# Altium PCB OPG_v8_pcb.PcbDoc (part 3 of 3)
Units mm, origin at the board's own origin, x right, y up, seen from the top; angles counter-clockwise.
Board outline 65 x 95 mm, 2 copper layers (Top Layer, Bottom Layer), stack 0.081 mm thick; 16 components, 17 nets, 129 pads, 66 vias.
Unrouted connection lines stored in the file: 30.
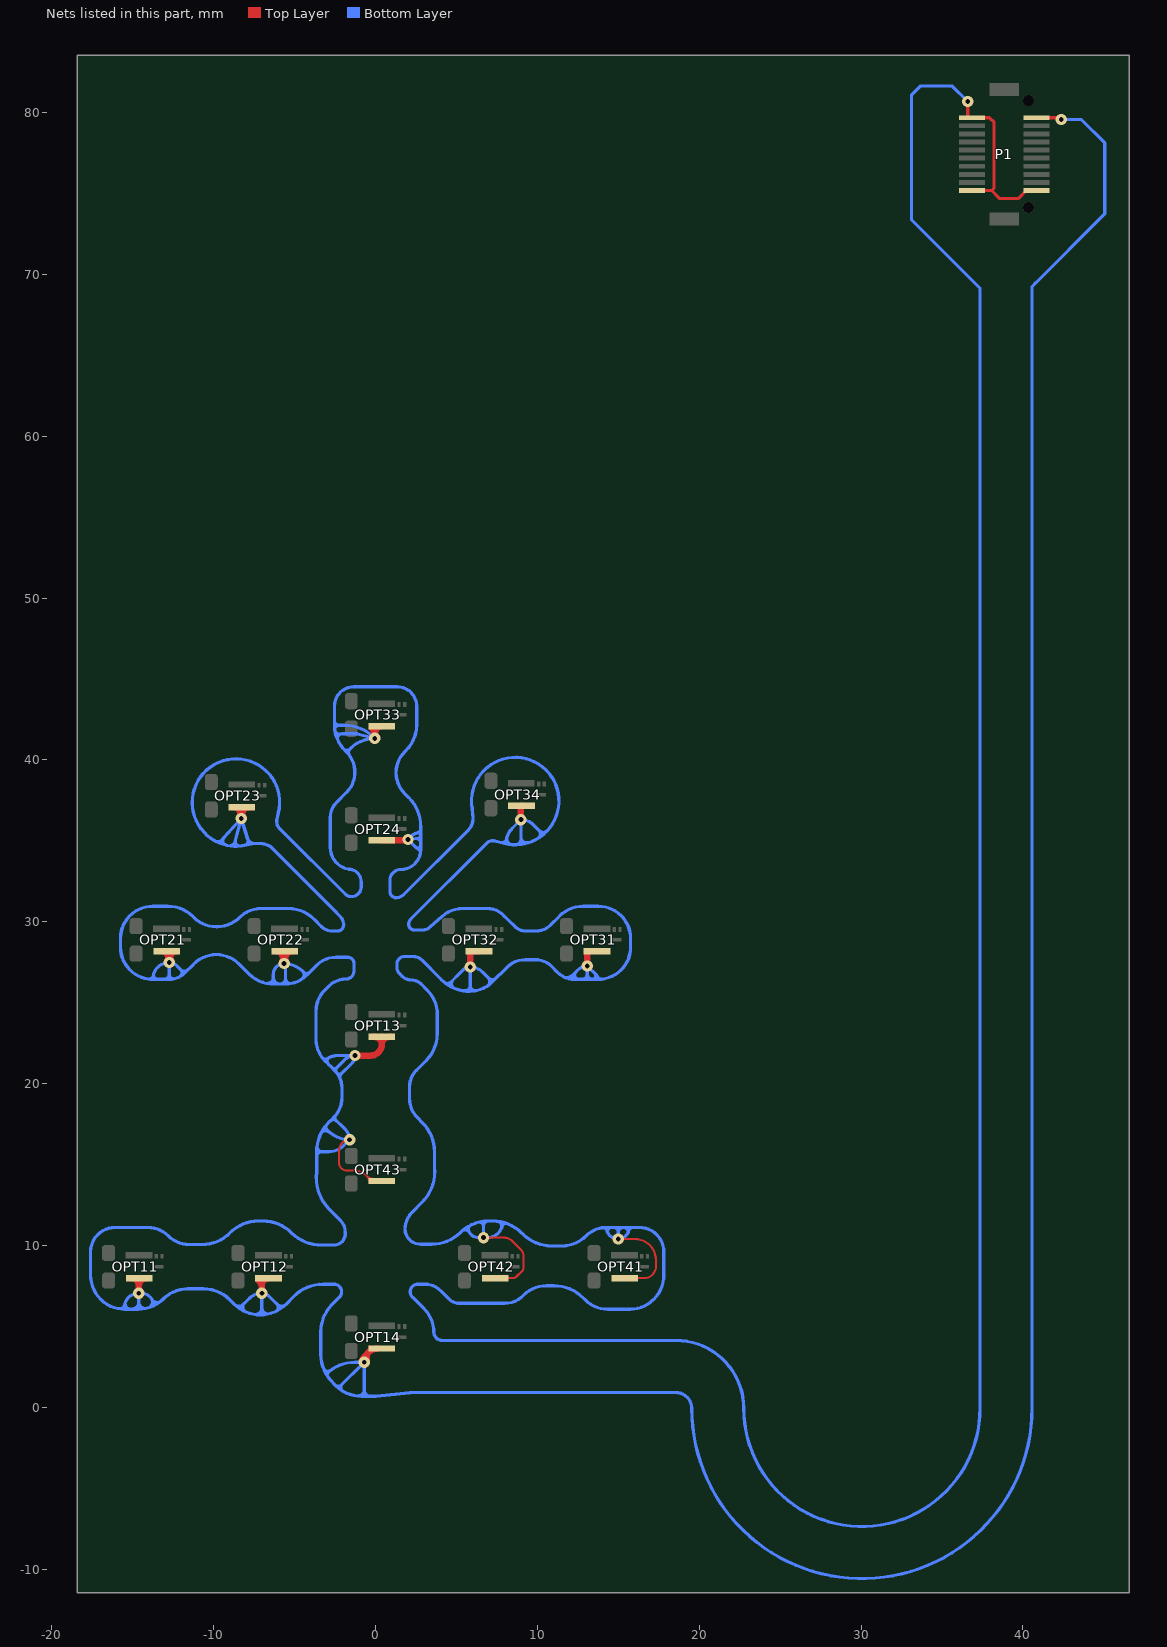
[diagram p3: the nets of this part, all layers, seen from the top]

## Via types
v1: diameter 0.7, hole 0.3, Top Layer to Bottom Layer, 49 vias
v2: diameter 0.7/0.5 (per signal layer), hole 0.3, Top Layer to Bottom Layer, 17 vias

## Nets (pads, with @x,y where several pads share a name; then routed paths per layer and width w, separated by ;. In a path a pad name is that pad's centre, name@x,y a point inside that pad or via, vN(x,y) a via of type N, cw(c..) or ccw(c..) an arc to the next point about the centre after c; other vN are vias at no path point) (continued)
Vbias: OPT11.A OPT12.A OPT13.A OPT14.A OPT21.A OPT22.A OPT23.A OPT24.A OPT31.A OPT32.A OPT33.A OPT34.A OPT41.A OPT42.A OPT43.A P1.1 P1.10 P1.11 P1.20 | length 733.9
  Top Layer w0.127: v1(-1.6,16.53) ccw(c-1.6,15.88) -2.25,15.88 -2.25,15.083 ccw(c-1.797,15.083) -1.797,14.63 -1.341,14.63 cw(c-1.341,13.529) -0.563,14.308 ; v1@-0.966,2.784 cw(c-0.361,2.784) -0.789,3.211 -0.463,3.537 ccw(c-0.687,3.762) OPT14.A@-0.37,3.762 ; OPT43.A@-0.366,13.869 ccw(c-0.95,13.869) -0.537,14.282 ; OPT43.A@0.01,14.11 -0.085,14.11 cw(c-0.085,14.786) -0.563,14.308 ; OPT43.A@0.39,13.98 -0.235,13.98 -0.537,14.282 ; v1(6.67,10.484) 7.917,10.484 cw(c7.917,9.712) 8.462,10.258 ; OPT42.A@7.39,7.98 8.152,7.98 8.513,7.98 ccw(c8.513,8.219) 8.682,8.05 9.078,8.446 ccw(c8.904,8.62) 9.15,8.62 9.15,9.34 ccw(c8.595,9.34) 8.987,9.733 8.465,10.255 ; v1(15,10.391) 16.032,10.391 cw(c16.032,9.097) 16.947,10.013 ; OPT41.A@15.39,7.98 16.599,7.98 ccw(c16.599,8.706) 17.113,8.193 ccw(c16.599,8.706) 17.325,8.706 17.325,9.1 ccw(c16.033,9.1) 16.948,10.012 ; -0.563,14.308 -0.537,14.282
  Top Layer w0.2: v1@-14.819,7.213 ccw(c-15.034,7.428) -14.729,7.428 -14.729,7.548 ; -14.528,7.547 -14.528,7.426 ccw(c-14.223,7.426) v1@-14.439,7.211 ; OPT12.A@-7.335,7.807 cw(c-8.085,7.058) -7.025,7.058 v1(-7.025,7.045) ; -6.924,7.546 -6.924,7.426 ccw(c-6.619,7.426) v1@-6.835,7.211 ; v1@-0.455,2.737 -0.455,3.108 cw(c-0.143,3.108) -0.364,3.329 OPT14.A@-0.101,3.592 ; v1@1.968,35.058 1.976,35.058 v1(2.004,35.085) ; OPT31.A@13.08,28.08 13.18,28.18 OPT31.A@13.49,28.18 ; v2(36.597,80.684) 36.597,79.734 36.647,79.684 37.927,79.684 38.222,79.389 38.222,75.339 38.067,75.184 ; P1.10@36.85,75.184 38.067,75.184 ; P1.11@40.85,75.184 40.2,75.184 39.7,74.684 38.567,74.684 38.067,75.184 ; P1.20@40.85,79.684 42.118,79.684 42.232,79.57 v2(42.367,79.57)
  Top Layer w0.3: OPT21.A@-13.2,28.131 cw(c-13.204,27.781) v1@-12.907,27.597 ; v1@-12.587,27.596 cw(c-12.289,27.78) OPT21.A@-12.293,28.13 ; OPT23.A@-8.759,37.032 cw(c-8.763,36.682) v1@-8.465,36.497 ; v1@-8.129,36.495 cw(c-7.832,36.679) OPT23.A@-7.836,37.029 ; OPT22.A@-6.16,28.132 cw(c-6.165,27.732) v1@-5.825,27.522 ; v1@-5.473,27.523 cw(c-5.133,27.733) OPT22.A@-5.138,28.133 ; OPT33.A@-0.279,41.952 cw(c-0.488,41.671) v1@-0.194,41.481 ; OPT13.A@-0.13,22.841 OPT13.A@-0.021,22.841 ; v1@0.083,41.494 cw(c0.377,41.684) OPT33.A@0.383,42.033
  Top Layer w0.4: OPT11.A@-15.051,7.977 cw(c-15.051,7.556) -14.63,7.556 ; OPT11.A@-14.65,7.98 -14.63,7.98 OPT11.A@-14.63,7.96 ; v1(-14.63,7.045) -14.63,7.494 ; OPT11.A@-14.61,7.98 ccw(c-14.61,7.96) OPT11.A@-14.63,7.96 ; OPT11.A@-14.144,7.98 ccw(c-14.144,7.494) -14.63,7.494 ; v1@-7.025,7.058 -7.025,7.565 ; v1(-1.268,21.731) -0.309,21.731 ccw(c-0.309,22.43) 0.39,22.43 ; v1(-0.7,2.78) cw(c0.15,2.78) -0.101,3.592 cw(c0.15,2.78) OPT14.A@0.15,3.63 ; OPT13.A@-0.172,22.88 -0.06,22.88 cw(c-0.06,22.43) 0.39,22.43 ; OPT13.A@0.39,22.88 0.39,22.43 ; OPT24.A@0.39,35.03 1.87,35.03 ccw(c1.87,35.219) 1.968,35.058 ccw(c1.87,35.219) v1(2.004,35.085) ; OPT13.A@0.926,22.88 0.84,22.88 ccw(c0.84,22.43) 0.39,22.43 ; v1(5.851,27.206) 5.851,28.18 OPT32.A@6.39,28.18 ; v1(8.98,36.31) 8.98,37.063 cw(c9.117,37.063) OPT34.A@9.02,37.16 ; v1(13.08,27.261) 13.08,28.08 13.08,28.18 OPT31.A@13.18,28.18 ; -14.63,7.494 -14.63,7.556 ; -14.63,7.556 OPT11.A@-14.63,7.96 ; -7.025,7.565 cw(c-6.61,7.565) OPT12.A@-6.61,7.98 -7.025,7.98 -7.025,7.565
  Top Layer w0.45: v1(-12.75,27.48) OPT21.A@-12.75,28.14 ; v1(-8.3,36.38) OPT23.A@-8.3,37.04 ; v1(-5.65,27.42) OPT22.A@-5.65,28.14 ; v1(-0.05,41.33) OPT33.A@-0.05,41.94
  Bottom Layer w0.152: -9.392,35.135 ccw(c-9.175,35.004) -9.284,34.775 ; -8.952,34.716 ccw(c-8.998,35.017) -8.719,34.895 ; -8.159,34.729 ccw(c-8.146,34.983) -7.916,35.09 ; -2.514,42.428 ccw(c-2.26,42.416) -2.22,42.165 ; -2.506,41.823 cw(c-2.256,41.863) -2.243,42.116 ; -2.481,41.78 ccw(c-2.241,41.863) -2.169,41.619 ; -2.341,41.273 cw(c-2.095,41.338) -2.138,41.589 ; -1.985,40.722 ccw(c-1.774,40.863) -1.638,40.649 ; -1.615,40.328 cw(c-1.4,40.464) -1.541,40.675 ; 2.485,35.12 cw(c2.525,34.869) 2.779,34.856 ; 2.526,34.601 ccw(c2.626,34.716) 2.776,34.741 ; 2.578,35.469 cw(c2.606,35.294) 2.784,35.285 ; 2.587,35.169 ccw(c2.595,35.347) 2.771,35.375 ; 2.588,34.494 cw(c2.507,34.254) 2.723,34.12 ; 2.597,35.519 ccw(c2.516,35.76) 2.77,35.774
  Bottom Layer w0.178: -14.104,6.127 ccw(c-14.198,6.518) -13.896,6.784 ; -13.847,6.7 ccw(c-13.492,6.888) -13.202,6.609 ; -12.018,27.032 ccw(c-11.807,27.252) -11.602,27.026 ; -9.847,34.975 ccw(c-9.731,35.257) -9.498,35.06 ; -8.762,6.404 ccw(c-8.443,6.657) -8.106,6.427 ; -8.072,6.453 ccw(c-7.867,6.194) -8.006,5.895 ; -6.154,6.424 cw(c-6.327,6.172) -6.137,5.933 ; -6.127,6.413 ccw(c-5.808,6.665) -5.472,6.435 ; -4.572,26.447 ccw(c-4.731,26.71) -4.546,26.955 ; -4.49,26.904 ccw(c-4.27,27.119) -4.022,26.939 ; -3.347,16.971 cw(c-3.098,16.754) -2.907,17.023 ; -3.33,21.658 ccw(c-3.103,21.771) -3.322,21.643 ; -3.288,21.597 ccw(c-3.103,21.771) -2.94,21.577 ; -3.203,2.353 ccw(c-2.955,2.532) -2.754,2.303 ; -3.011,17.159 cw(c-2.719,17.312) -3.01,17.467 cw(c-2.719,17.312) -2.988,17.503 ; -2.902,21.208 cw(c-2.735,21.399) -2.897,21.595 cw(c-2.735,21.399) -2.849,21.626 ; -2.882,1.789 cw(c-2.653,1.99) -2.832,2.238 ; -2.801,17.677 cw(c-2.61,17.51) -2.435,17.694 ; -2.746,21.041 ccw(c-2.543,21.193) -2.364,21.014 ; -2.553,1.428 ccw(c-2.305,1.607) -2.104,1.378 ; -2.417,18.088 ccw(c-2.248,17.898) -2.416,17.707 ; -2.36,20.631 cw(c-2.193,20.822) -2.306,21.049 ; -2.36,20.632 ccw(c-2.23,20.784) -2.087,20.644 ; -2.173,20.285 cw(c-1.944,20.394) -2.135,20.561 ; -2.004,1.473 ccw(c-1.825,1.225) -1.975,0.96 ; 4.209,26.299 ccw(c4.443,26.529) 4.662,26.285 ; 4.77,26.38 ccw(c5.023,26.17) 4.855,25.888 ; 5.335,10.888 cw(c5.528,10.652) 5.798,10.795 ; 5.764,10.858 cw(c6.042,10.982) 5.919,11.261 ; 6.915,26.576 cw(c6.723,26.31) 6.923,26.049 ; 7.03,26.503 ccw(c7.23,26.763) 7.483,26.554 ; 7.487,11.488 cw(c7.487,11.183) 7.79,11.149 ; 7.737,34.905 ccw(c7.802,35.203) 8.098,35.132 ; 7.806,11.094 cw(c8.06,11.094) 8.205,11.302 ; 12.404,26.909 ccw(c12.56,26.709) 12.481,26.468 ccw(c12.56,26.709) 12.517,26.459 ; 13.457,26.437 ccw(c13.333,26.659) 13.542,26.803 ; 13.741,26.58 ccw(c14.001,26.795) 14.103,26.474
  Bottom Layer w0.2: -17.168,10.667 ccw(c-16.099,9.599) -17.61,9.599 -17.61,8.181 ccw(c-15.459,8.181) -16.981,6.661 ; -17.167,10.668 cw(c-16.099,9.599) -16.099,11.11 -14.068,11.11 cw(c-14.068,9.31) -12.795,10.583 ccw(c-11.526,11.854) -11.526,10.058 -10.719,10.058 ccw(c-10.719,12.496) -8.996,10.771 cw(c-7.238,9.051) -7.238,11.51 -6.969,11.51 cw(c-6.969,8.97) -5.173,10.766 ccw(c-3.377,12.562) -3.377,10.022 -2.57,10.022 ccw(c-2.57,10.722) -1.87,10.722 -1.87,10.789 ccw(c-2.987,10.792) -2.2,11.585 ccw(c-2.343,11.445) -2.202,11.587 -2.859,12.244 cw(c-0.936,14.175) -3.64,14.512 -3.64,15.498 ; -16.98,6.66 ccw(c-15.53,8.111) -15.927,6.099 ; -13.707,6.273 ccw(c-14.479,6.273) -13.787,6.616 ccw(c-14.479,6.273) -13.852,6.723 ccw(c-14.479,6.273) -14.479,7.045 v1(-14.63,7.045) ; -12.047,27.054 cw(c-12.255,26.845) -12.042,26.641 ; -9.835,29.69 cw(c-9.835,31.682) -11.243,30.273 -11.296,30.326 ccw(c-12.828,28.792) -12.828,30.96 -13.761,30.96 ccw(c-13.761,28.959) -15.176,30.374 ccw(c-13.763,28.963) -15.76,28.963 -15.76,28.437 ccw(c-13.763,28.437) -15.175,27.025 ccw(c-13.763,28.437) -14.082,26.466 ; -9.779,29.69 ccw(c-9.779,31.619) -8.487,30.186 ccw(c-9.779,31.619) -8.415,30.255 -8.343,30.324 cw(c-7.051,28.891) -7.051,30.82 -5.393,30.82 cw(c-5.393,28.567) -3.8,30.16 -3.345,29.705 -3.344,29.704 ccw(c-2.667,30.384) -2.667,29.425 -2.355,29.425 ccw(c-2.355,29.81) -1.97,29.81 ccw(c-2.696,29.81) -2.183,30.323 -2.621,30.762 -6.518,34.658 ccw(c-7.123,33.675) -7.123,34.83 -7.424,34.83 ccw(c-7.424,34.63) -7.456,34.827 ; -7.432,5.73 ccw(c-7.432,6.137) -7.025,6.137 ; -6.645,5.763 cw(c-6.645,6.142) -7.025,6.142 ; -3.62,16.106 ccw(c-3.302,16.106) -3.302,15.788 ; -3.011,17.159 -2.936,17.083 ccw(c-1.6,18.419) v1(-1.6,16.53) ; -2.903,17.029 -2.941,17.049 -2.943,17.05 -2.951,17.055 -3.041,17.103 -3.217,17.196 ; -2.685,1.573 cw(c-0.981,3.262) -3.049,2.046 ; -2.684,1.573 cw(c-2.827,1.433) -2.671,1.557 ccw(c-0.869,2.982) -2.281,1.17 ; -2.083,20.641 -2.144,20.568 ; -1.338,26.947 cw(c-1.824,26.947) -1.824,26.461 ccw(c-1.824,24.942) -2.898,26.016 -3.144,25.77 ccw(c-1.859,24.487) -3.675,24.487 -3.675,22.733 ccw(c-1.818,22.733) -3.322,21.643 ccw(c-1.818,22.733) -3.288,21.597 ccw(c-1.818,22.733) -3.13,21.418 ; -1.325,26.945 -1.325,27.405 ccw(c-1.73,27.405) -1.73,27.81 -2.44,27.81 ccw(c-2.44,26.12) -3.634,27.316 -4.264,26.686 ; v1@-0.77,2.531 v1@-0.7,2.601 ; 4.105,4.13 cw(c4.105,4.632) 3.603,4.633 ccw(c1.56,4.632) 3.005,6.077 2.324,6.757 cw(c2.623,7.135) 2.141,7.135 cw(c2.612,7.135) 2.612,7.605 3.044,7.605 cw(c3.044,6.229) 4.017,7.203 4.523,6.697 cw(c4.382,6.555) 4.525,6.695 ccw(c5.19,7.363) 5.191,6.42 8.007,6.42 ccw(c8.007,7.954) 9.144,6.924 cw(c10.557,5.512) 10.557,7.509 11.023,7.509 cw(c11.023,4.969) 12.819,6.766 12.949,6.636 ccw(c14.338,8.022) 14.339,6.06 15.736,6.06 ccw(c15.736,8.111) 17.185,6.66 ccw(c15.664,8.181) 17.815,8.181 17.815,9.599 ccw(c16.304,9.599) 16.304,11.11 15.897,11.11 ; 4.106,4.13 18.551,4.13 cw(c18.551,-0.072) 22.753,-0.072 ccw(c30.053,-0.072) 37.353,-0.072 37.353,69.13 33.121,73.363 33.121,81.108 33.647,81.634 35.647,81.634 v2(36.597,80.684) ; 6.18,25.734 cw(c6.18,26.062) 5.851,26.062 ; 7.856,11.434 cw(c6.906,11.434) 6.906,10.484 v1(6.67,10.484) ; 8.1,35.135 ccw(c8.475,35.135) 8.384,34.771 ; 10.058,35.689 cw(c9.851,35.424) 10.096,35.194 ; 10.139,35.61 ccw(c10.369,35.855) 10.634,35.648 ; 12.752,26.45 ccw(c12.752,26.777) 13.08,26.777 ; 13.975,11.085 14.086,11.085 cw(c14.086,10.849) 14.286,10.975 ; v1@14.72,10.51 14.746,10.51 14.769,10.487 v1@14.977,10.487 ; 40.566,69.248 40.569,69.251 ; 40.839,69.521 40.569,69.251 ; v2(42.367,79.57) 43.611,79.57 45.057,78.124 45.057,73.739 40.569,69.251 ; -15.927,6.099 ccw(c-15.53,8.111) -15.53,6.06 ; -15.927,6.099 -15.761,6.099 ccw(c-15.761,6.385) -15.527,6.22 ; -15.53,6.06 -15.53,6.145 cw(c-14.63,6.145) -15.527,6.22 ; -15.53,6.06 -15.15,6.06 ; -15.527,6.22 cw(c-14.63,6.145) v1(-14.63,7.045) ; -15.527,6.22 ccw(c-15.761,6.385) -15.475,6.385 ccw(c-15.15,6.385) -15.15,6.06 ; -15.15,6.06 -15.072,6.06 ; -15.072,6.06 ccw(c-15.072,6.502) -14.63,6.502 ; -15.072,6.06 -14.64,6.06 ; -14.64,6.06 ccw(c-14.64,8.208) -14.228,6.1 ; -14.64,6.06 -14.63,6.07 -14.63,6.502 ; -14.63,6.502 ccw(c-14.228,6.502) -14.228,6.1 ; -14.63,6.502 v1(-14.63,7.045) ; -14.228,6.1 ccw(c-14.64,8.208) -13.121,6.689 cw(c-11.602,5.17) -11.602,7.318 -10.641,7.318 cw(c-10.641,4.997) -9,6.638 -8.737,6.375 ccw(c-7.131,7.982) -8.418,6.109 ; -14.082,26.466 ccw(c-13.763,28.437) -13.763,26.44 ; -14.082,26.466 -13.969,26.466 ccw(c-13.969,26.71) -13.755,26.593 ; -13.763,26.44 -13.455,26.44 ; -13.763,26.44 -13.763,26.467 cw(c-12.75,26.467) -13.755,26.593 ; -13.755,26.593 cw(c-12.75,26.467) v1(-12.75,27.48) ; -13.755,26.593 ccw(c-13.969,26.71) -13.725,26.71 ccw(c-13.455,26.71) -13.455,26.44 ; -13.455,26.44 -13.074,26.44 ; -13.074,26.44 ccw(c-13.074,26.764) -12.75,26.764 ; -13.074,26.44 -12.731,26.44 ; -12.75,26.764 ccw(c-12.455,26.764) -12.455,26.469 ; -12.75,26.764 v1(-12.75,27.48) ; -12.75,26.764 -12.75,26.486 ccw(c-12.685,26.486) -12.731,26.44 ; v1(-12.75,27.48) cw(c-12.75,26.808) -12.275,27.283 -11.811,26.819 ; -12.731,26.44 ccw(c-12.731,27.746) -12.455,26.469 ; -12.455,26.469 ccw(c-12.731,27.746) -11.811,26.819 ; -11.811,26.819 ccw(c-12.731,27.746) -11.807,26.823 -11.243,27.387 cw(c-9.835,25.978) -9.835,27.97 cw(c-9.835,25.978) -8.427,27.387 -7.808,26.768 ccw(c-6.316,28.261) -6.734,26.192 ; -9.66,34.875 ccw(c-8.627,37.369) -9.265,34.746 ccw(c-8.627,37.369) -9.143,34.719 ccw(c-8.627,37.369) -8.752,34.672 ; -9.66,34.875 cw(c-8.627,37.369) -6.009,36.71 -6.095,36.321 ccw(c-5.9,36.278) -6.1,36.278 -6.1,36.142 ccw(c-5.598,36.142) -5.953,35.787 -1.857,31.691 -1.839,31.676 ccw(c-1.48,32.145) -0.889,32.145 -0.889,32.465 ccw(c-1.674,32.465) -1.674,33.251 cw(c-1.439,34.585) -2.794,34.585 -2.794,36.465 -2.794,36.467 cw(c-1.529,36.467) -2.423,37.362 -1.796,37.989 ccw(c-3.048,39.242) -1.452,40.01 ccw(c-3.11,39.212) -1.775,40.478 ; -9.66,34.875 -9.477,35.078 -9.411,35.151 v1(-8.3,36.38) ; -8.752,34.672 ccw(c-8.627,37.369) -8.372,34.681 ; -8.752,34.672 -8.707,34.841 ccw(c-8.917,34.96) -8.676,34.96 ; -8.676,34.96 ccw(c-8.397,34.96) -8.397,34.681 -8.372,34.681 ; -8.676,34.96 v1(-8.3,36.38) ; -8.418,6.109 ccw(c-7.131,7.982) -7.131,5.71 ; -8.418,6.109 -7.805,6.722 cw(c-7.025,5.942) v1(-7.025,7.045) ; -8.372,34.681 ccw(c-8.627,37.369) -8.134,34.715 -8.103,34.72 -7.795,34.771 ; v1(-8.3,36.38) -7.897,35.096 -7.883,35.05 ; -7.883,35.05 -7.853,34.956 -7.795,34.771 ; -7.883,35.05 -7.804,34.971 ccw(c-7.456,35.319) -7.456,34.827 ; -7.795,34.771 -7.456,34.827 ; -7.131,5.71 ccw(c-7.131,5.816) -7.025,5.816 -7.025,6.137 ; -7.131,5.71 ccw(c-7.131,7.982) -5.836,6.115 ; -7.025,6.137 -7.025,6.142 ; -7.025,6.142 v1(-7.025,7.045) ; v1(-7.025,7.045) cw(c-7.025,6.42) -6.583,6.862 -5.836,6.115 ; -6.734,26.192 ccw(c-6.316,28.261) -6.316,26.15 ; -6.734,26.192 -6.682,26.192 ccw(c-6.682,26.558) -6.316,26.558 ; -6.316,26.15 -6.316,26.558 ; -6.316,26.15 -5.908,26.15 ; -6.316,26.558 ccw(c-5.908,26.558) -5.908,26.15 ; -6.316,26.558 -6.316,26.754 cw(c-5.65,26.754) v1(-5.65,27.42) ; -5.908,26.15 -5.893,26.15 ; -5.893,26.15 ccw(c-5.893,26.485) -5.558,26.485 ; -5.893,26.15 -5.558,26.15 ; -5.836,6.115 ccw(c-7.131,7.982) -5.525,6.375 -5.038,6.862 cw(c-3.242,5.066) -3.242,7.606 -2.571,7.606 cw(c-2.571,7.135) -2.1,7.135 cw(c-2.582,7.135) -2.283,6.757 -2.671,6.369 ccw(c-0.956,4.656) -3.38,4.656 -3.38,3.262 ccw(c-0.981,3.262) -3.049,2.046 ; v1(-5.65,27.42) cw(c-5.65,25.847) -4.538,26.959 -4.264,26.686 ; v1(-5.65,27.42) cw(c-5.65,27.328) -5.558,27.328 -5.558,26.485 ; -5.558,26.15 ccw(c-5.558,27.979) -5.24,26.178 ; -5.558,26.15 -5.558,26.485 ; -5.558,26.485 ccw(c-5.251,26.485) -5.251,26.178 -5.24,26.178 ; -5.24,26.178 ccw(c-5.558,27.979) -4.264,26.686 ; -3.64,15.498 cw(c-3.35,15.498) -3.35,15.788 ; -3.64,15.498 -3.64,15.788 ; -3.64,15.788 cw(c-1.087,15.788) -3.217,17.196 ; -3.64,15.788 -3.35,15.788 ; -3.35,15.788 -3.302,15.788 ; -3.302,15.788 -2.899,15.788 ccw(c-2.899,17.132) -1.949,16.181 v1(-1.6,16.53) ; -3.217,17.196 cw(c-1.087,15.788) -3.01,17.467 cw(c-1.087,15.788) -2.917,17.568 -2.6,17.885 ; -3.13,21.418 cw(c-2.376,20.664) -2.897,21.595 cw(c-2.376,20.664) -2.376,21.731 v1(-1.268,21.731) ; -3.13,21.418 -2.923,21.211 -2.911,21.199 -2.749,21.038 -2.544,20.832 ; -3.049,2.046 cw(c-1.277,0.274) -1.277,2.78 v1(-0.7,2.78) ; -2.6,17.885 ccw(c-3.869,19.153) -2.075,19.153 -2.075,19.702 ccw(c-3.672,19.702) -2.253,20.435 ; -2.6,17.885 -1.851,17.136 cw(c-2.457,16.53) v1(-1.6,16.53) ; -2.544,20.832 cw(c-3.672,19.702) -2.253,20.435 ; -2.544,20.832 -1.912,21.464 cw(c-1.268,20.82) v1(-1.268,21.731) ; -2.54,42.142 ccw(c-0.372,42.142) -2.429,41.459 ; -2.54,42.142 -2.54,43.325 cw(c-1.345,43.325) -2.19,44.17 cw(c-1.345,43.325) -1.345,44.52 1.345,44.52 cw(c1.345,43.325) 2.19,44.17 cw(c1.345,43.325) 2.54,43.325 2.54,42.142 cw(c0.372,42.142) 1.906,40.61 cw(c0.372,42.142) 1.905,40.609 1.809,40.513 ccw(c3.11,39.212) 1.27,39.212 ccw(c3.1,39.212) 1.805,37.919 2.05,37.674 cw(c0.254,35.878) 2.794,35.878 2.794,35.524 ; -2.54,42.142 -1.914,42.142 cw(c-1.914,39.602) -0.118,41.398 v1(-0.05,41.33) ; -2.429,41.459 ccw(c-0.372,42.142) -2.272,41.098 ccw(c-0.372,42.142) -1.906,40.61 -1.809,40.513 cw(c-3.11,39.212) -1.775,40.478 ; -2.429,41.459 cw(c-2.064,41.093) -2.064,41.61 -1.125,41.61 -0.13,41.351 v1(-0.05,41.33) ; -2.281,1.17 ccw(c-0.869,2.982) -2.031,1 ccw(c-0.869,2.982) -1.132,0.7 ; -2.281,1.17 cw(c-2.212,1.17) -2.261,1.219 v1(-0.7,2.78) ; -2.253,20.435 -2.144,20.568 ; -2.144,20.568 -1.471,21.241 ccw(c-1.961,21.731) v1(-1.268,21.731) ; -1.775,40.478 -1.539,40.713 cw(c-0.05,39.224) v1(-0.05,41.33) ; -1.132,0.7 ccw(c-0.869,2.982) -0.868,0.685 -0.65,0.685 ; -1.132,0.7 -1.06,0.7 ccw(c-1.06,1.06) -0.7,1.06 ; -0.7,1.06 ccw(c-0.325,1.06) -0.325,0.685 ; -0.7,1.06 v1@-0.7,2.601 ; -0.7,1.06 -0.7,0.806 ccw(c-0.529,0.806) -0.65,0.685 ; v1@-0.7,2.601 v1(-0.7,2.78) ; -0.65,0.685 -0.325,0.685 ; -0.325,0.685 0.013,0.685 1.227,0.81 2.108,0.9 2.374,0.909 2.388,0.91 18.555,0.91 cw(c18.555,-0.072) 19.538,-0.072 ccw(c30.053,-0.072) 40.569,-0.072 40.569,69.251 ; v1(2.004,35.085) 2.511,34.578 ccw(c2.794,34.862) 2.794,34.461 ; v1(2.004,35.085) 2.483,35.136 2.589,35.148 2.794,35.169 ; v1(2.004,35.085) 2.193,35.275 cw(c2.794,34.674) 2.794,35.524 ; 2.794,34.461 cw(c1.563,34.461) 1.563,33.23 ccw(c1.563,32.556) 0.889,32.556 0.889,31.871 ccw(c1.275,31.871) 1.275,31.485 ccw(c1.275,32.161) 1.753,31.683 5.73,35.66 ccw(c5.03,36.36) 6.02,36.351 ccw(c5.82,36.353) 6.019,36.369 5.97,36.995 cw(c8.63,37.46) 10.359,35.386 ; 2.794,34.461 2.794,35.169 ; 2.794,35.169 2.794,35.524 ; 4.478,26.09 ccw(c5.816,28.19) 5.367,25.741 ; 4.478,26.09 cw(c5.816,28.19) 4.056,26.429 4.055,26.43 2.844,27.641 ccw(c2.34,27.138) 2.34,27.85 1.77,27.85 ccw(c1.77,27.405) 1.325,27.405 1.325,27.175 ccw(c1.881,27.175) 1.488,26.783 1.623,26.648 ccw(c2.22,27.245) 2.22,26.401 cw(c2.22,25.556) 2.817,26.154 3.196,25.775 cw(c1.687,24.267) 3.82,24.267 3.82,23.112 cw(c1.425,23.112) 3.119,21.419 2.53,20.83 ccw(c3.568,19.792) 2.1,19.792 2.1,19.086 ccw(c3.804,19.086) 2.599,17.881 2.896,17.584 cw(c1.1,15.788) 3.64,15.788 3.64,14.831 cw(c0.967,14.553) 2.867,12.652 2.244,12.029 ccw(c3.256,11.017) 1.825,11.016 ccw(c2.77,11.016) 2.77,10.07 3.492,10.07 ccw(c3.492,12.528) 5.23,10.79 cw(c6.969,9.051) 5.697,11.156 ; 4.478,26.09 5.411,27.023 cw(c5.851,26.583) v1(5.851,27.206) ; 5.367,25.741 ccw(c5.816,28.19) 5.816,25.7 ; 5.367,25.741 5.53,25.741 ccw(c5.53,26.062) 5.851,26.062 ; 5.697,11.156 cw(c6.969,9.051) 6.387,11.44 ; 5.697,11.156 ccw(c6.37,11.156) 6.37,10.484 v1(6.67,10.484) ; 5.816,25.7 ccw(c5.73,25.786) 5.851,25.786 5.851,26.062 ; 5.816,25.7 ccw(c5.816,27.691) 7.223,26.283 ; 5.851,26.062 v1(5.851,27.206) ; v1(5.851,27.206) cw(c5.851,26.122) 6.617,26.888 7.223,26.283 ; 6.387,11.44 cw(c6.969,9.051) 6.67,11.492 ; 6.387,11.44 6.441,11.44 cw(c6.441,11.211) 6.67,11.211 ; v1(6.67,10.484) 6.67,11.211 ; 6.67,11.211 cw(c6.969,11.211) 6.969,11.51 ; 6.67,11.211 6.67,11.492 ; 6.67,11.492 cw(c6.969,9.051) 6.696,11.495 cw(c6.969,9.051) 6.969,11.51 ; 6.969,11.51 7.238,11.51 cw(c7.238,8.97) 9.034,10.766 9.086,10.714 ccw(c10.882,12.51) 10.882,9.97 11.521,9.97 ccw(c11.521,12.062) 13.001,10.583 cw(c14.273,9.31) 14.273,11.11 ; 7.223,26.283 8.138,27.198 cw(c9.247,26.088) 9.247,27.657 9.887,27.657 cw(c9.887,26.265) 10.871,27.249 11.24,26.88 ccw(c12.302,27.942) 11.767,26.539 ; 8.06,34.821 cw(c9.435,34.821) 8.463,35.793 v1(8.98,36.31) ; 8.06,34.821 ccw(c8.63,37.46) 8.384,34.771 ; 8.06,34.821 7.735,34.901 7.314,35.004 ccw(c7.266,34.81) 7.266,35.01 7.239,35.01 ccw(c7.239,34.495) 6.875,34.859 6.769,34.753 2.191,30.175 ccw(c2.53,29.835) 2.05,29.835 ccw(c2.391,29.835) 2.391,29.494 2.429,29.494 2.43,29.494 2.925,29.494 ccw(c2.925,30.147) 3.387,29.685 4.102,30.324 cw(c5.393,28.891) 5.393,30.82 6.908,30.82 cw(c6.91,29.419) 7.901,30.409 8.186,30.124 8.632,29.678 ccw(c8.675,29.72) 8.675,29.66 ccw(c9.23,30.215) 9.23,29.43 9.932,29.43 ccw(c9.932,30.668) 10.808,29.793 11.372,30.357 cw(c12.828,28.901) 12.828,30.96 13.761,30.96 cw(c13.761,28.963) 15.174,30.375 cw(c13.761,28.963) 15.759,28.963 15.759,28.437 cw(c13.761,28.437) 15.175,27.026 cw(c13.76,28.441) 13.76,26.44 ; 8.384,34.771 ccw(c8.63,37.46) 8.625,34.76 ; 8.384,34.771 ccw(c8.475,35.135) 8.475,34.76 8.625,34.76 ; 8.625,34.76 ccw(c8.63,37.46) 8.635,34.76 ; 8.625,34.76 8.635,34.76 ; 8.635,34.76 ccw(c8.63,37.46) 8.695,34.761 ; 8.635,34.76 8.673,34.76 ccw(c8.673,35.067) 8.695,34.761 ; 8.695,34.761 ccw(c8.63,37.46) 9.034,34.79 ; 8.695,34.761 ccw(c8.673,35.067) 8.98,35.067 ; 8.98,35.067 8.98,34.92 ccw(c9.163,34.92) 9.034,34.79 ; 8.98,35.067 8.98,35.213 ; 8.98,35.213 ccw(c9.316,35.213) 9.316,34.877 9.417,34.877 ; 8.98,35.213 v1(8.98,36.31) ; v1(8.98,36.31) cw(c8.98,35.213) 9.756,35.989 10.359,35.386 ; 9.034,34.79 ccw(c8.63,37.46) 9.417,34.877 ; 9.417,34.877 ccw(c8.63,37.46) 10.359,35.386 ; 11.767,26.539 ccw(c11.767,27.158) 12.205,26.72 ; 11.767,26.539 ccw(c12.302,27.942) 12.302,26.44 12.827,26.44 ; 12.205,26.72 12.51,27.025 cw(c13.08,26.455) v1(13.08,27.261) ; 12.205,26.72 12.063,26.579 ccw(c12.827,28.608) 12.481,26.468 ccw(c12.827,28.608) 12.622,26.45 ccw(c12.827,28.608) 12.827,26.44 ; 12.827,26.44 13.075,26.44 ; 13.075,26.44 13.417,26.44 ; 13.075,26.44 13.08,26.445 13.08,26.777 ; 13.08,26.777 ccw(c13.417,26.777) 13.417,26.44 ; 13.08,26.777 v1(13.08,27.261) ; v1(13.08,27.261) 13.66,26.681 cw(c13.419,26.44) 13.76,26.44 ; 13.417,26.44 13.76,26.44 ; 14.273,11.11 ccw(c14.992,11.11) 14.286,10.975 ; 14.273,11.11 14.583,11.11 ; 14.286,10.975 ccw(c14.992,11.11) 14.322,10.849 ; 14.286,10.975 cw(c14.086,10.849) 14.322,10.849 ; 14.322,10.849 ccw(c14.992,11.11) 14.992,10.391 v1(15,10.391) ; 14.322,10.849 cw(c14.583,10.849) 14.583,11.11 ; 14.583,11.11 14.7,11.11 ; 14.7,11.11 cw(c14.7,10.81) 15,10.81 ; 14.7,11.11 15,11.11 ; v1(15,10.391) ccw(c15,11.044) 15.646,10.956 ; v1(15,10.391) 15,10.81 ; 15,10.81 cw(c15.3,10.81) 15.3,11.11 ; 15,10.81 15,11.11 ; 15,11.11 15.3,11.11 ; 15.3,11.11 15.335,11.11 ; 15.335,11.11 cw(c15.335,10.829) 15.616,10.829 cw(c15.897,10.829) 15.646,10.956 ; 15.335,11.11 15.652,11.11 ; 15.646,10.956 ccw(c15,11.044) 15.652,11.044 15.652,11.11 ; 15.646,10.956 cw(c15.897,10.829) 15.897,11.11 ; 15.652,11.11 15.897,11.11
pads on no net: OPT11.S OPT12.S OPT13.S OPT14.S OPT21.S OPT22.S OPT23.S OPT24.S OPT31.S OPT32.S OPT33.S OPT34.S OPT41.S OPT42.S OPT43.S P1.0
copper on no net: | length 21.3
  Bottom Layer w0.127: -12.375,9.085 -9.375,9.085 ; -11.075,29.135 -8.2,29.135 ; -1.199,38.11 ccw(c-3.06,39.206) -1.093,40.097 ; 0.325,17.26 0.325,20.36 ; 1.175,40.835 ccw(c2.948,39.199) 1.242,37.492 ; 1.475,40.66 ccw(c3.062,39.196) 1.535,37.669 ; 9.725,8.76 13.025,8.76

## Polygon pours and split planes (outlines as drawn)
no net on Top Solder "NONET_L01_P-001" (solid): 36.147,76.367 37.557,76.367 37.557,75.992 36.147,75.992
no net on Top Solder "NONET_L01_P-001" (solid): 36.147,78.363 37.557,78.363 37.557,77.999 36.147,77.999
no net on Top Solder "NONET_L01_P-001" (solid): 40.147,79.873 41.557,79.873 41.557,79.498 40.147,79.498
no net on Top Solder "NONET_L01_P-001" (solid): 36.147,77.872 37.557,77.872 37.557,77.498 36.147,77.498
no net on Top Solder "NONET_L01_P-001" (solid): 40.147,77.369 41.557,77.369 41.557,76.994 40.147,76.994
no net on Top Solder "NONET_L01_P-001" (solid): 40.147,75.871 41.557,75.871 41.557,75.496 40.147,75.496
no net on Top Solder "NONET_L01_P-001" (solid): 36.147,78.863 37.557,78.863 37.557,78.489 36.147,78.489
no net on Top Solder "NONET_L01_P-001" (solid): 40.147,78.863 41.557,78.863 41.557,78.489 40.147,78.489
no net on Top Solder "NONET_L01_P-001" (solid): 36.147,75.871 37.557,75.871 37.557,75.496 36.147,75.496
no net on Top Solder "NONET_L01_P-001" (solid): 36.147,77.369 37.557,77.369 37.557,76.994 36.147,76.994
no net on Top Solder "NONET_L01_P-001" (solid): 40.147,77.872 41.557,77.872 41.557,77.498 40.147,77.498
no net on Top Solder "NONET_L01_P-001" (solid): 36.147,79.873 37.557,79.873 37.557,79.498 36.147,79.498
no net on Top Solder "NONET_L01_P-001" (solid): 40.147,76.367 41.557,76.367 41.557,75.992 40.147,75.992
no net on Top Solder "NONET_L01_P-001" (solid): 36.147,75.369 37.557,75.369 37.557,74.994 36.147,74.994
no net on Top Solder "NONET_L01_P-001" (solid): 40.147,78.363 41.557,78.363 41.557,77.999 40.147,77.999
no net on Top Solder "NONET_L01_P-001" (solid): 36.147,76.879 37.557,76.879 37.557,76.504 36.147,76.504
no net on Top Solder "NONET_L01_P-001" (solid): 40.147,76.879 41.557,76.879 41.557,76.504 40.147,76.504
no net on Top Solder "NONET_L01_P-001" (solid): 40.147,79.363 41.557,79.363 41.557,78.988 40.147,78.988
no net on Top Solder "NONET_L01_P-001" (solid): 36.147,79.363 37.557,79.363 37.557,78.988 36.147,78.988
no net on Top Solder "NONET_L01_P-001" (solid): 40.147,75.369 41.557,75.369 41.557,74.994 40.147,74.994
no net on Stiffener "NONET_L01_P-001" (solid): 36.95,66.66 36.95,68.968 32.764,73.153 cw(c32.87,73.26) 32.72,73.26 32.72,81.39 cw(c34.14,81.39) 34.14,82.81 44.04,82.81 cw(c44.04,81.39) 45.46,81.39 cw(c45.31,81.39) 45.413,81.28 cw(c45.31,81.17) 45.46,81.17 45.46,73.62 cw(c45.31,73.62) 45.416,73.513 40.97,69.068 40.97,66.66 cw(c40.82,66.66) 40.82,66.51 37.1,66.51 cw(c37.1,66.66)
no net on Stiffener "NONET_L01_P-001" (solid): -1.838,27.722 -1.725,27.722 cw(c-1.725,27.417) -1.42,27.417 -1.42,27.3 1.42,27.3 1.42,27.41 cw(c1.77,27.41) 1.77,27.76 1.98,27.76 ccw(c1.98,27.77) 1.99,27.77 1.99,29.47 ccw(c1.98,29.47) 1.98,29.48 cw(c2.27,29.77) 1.86,29.77 1.86,29.796 cw(c2.304,29.796) 1.99,30.11 0.87,31.23 -0.89,31.23 -1.84,30.28 cw(c-2.323,29.797) -1.64,29.797 -1.64,29.77 cw(c-2.244,29.77) -1.817,29.343 -1.84,29.32 -1.84,27.724 ccw(c-1.838,27.724)
LED_OUT_col4 on Top Layer "LED_OUT_COL4_L01_P006" (solid, pour order 6): 2.4,3.532 ccw(c3.172,3.618) 2.687,3.011 2.951,2.875 1.95,2.985 2.332,3.367 ccw(c2.167,3.532)
no net on Top Paste "NONET_L01_P-001" (solid): 41.55,79.79 40.15,79.79 40.15,79.58 41.55,79.58
no net on Top Paste "NONET_L01_P-001" (solid): 41.55,79.29 40.15,79.29 40.15,79.08 41.55,79.08
no net on Top Paste "NONET_L01_P-001" (solid): 41.55,78.79 40.15,78.79 40.15,78.58 41.55,78.58
no net on Top Paste "NONET_L01_P-001" (solid): 41.55,78.29 40.15,78.29 40.15,78.08 41.55,78.08
no net on Top Paste "NONET_L01_P-001" (solid): 41.55,77.79 40.15,77.79 40.15,77.58 41.55,77.58
no net on Top Paste "NONET_L01_P-001" (solid): 41.55,77.29 40.15,77.29 40.15,77.08 41.55,77.08
no net on Top Paste "NONET_L01_P-001" (solid): 41.55,76.79 40.15,76.79 40.15,76.58 41.55,76.58
no net on Top Paste "NONET_L01_P-001" (solid): 41.55,76.29 40.15,76.29 40.15,76.08 41.55,76.08
no net on Top Paste "NONET_L01_P-001" (solid): 41.55,75.79 40.15,75.79 40.15,75.58 41.55,75.58
no net on Top Paste "NONET_L01_P-001" (solid): 41.55,75.29 40.15,75.29 40.15,75.08 41.55,75.08
no net on Top Paste "NONET_L01_P-001" (solid): 37.55,75.29 36.15,75.29 36.15,75.08 37.55,75.08
no net on Top Paste "NONET_L01_P-001" (solid): 37.55,75.79 36.15,75.79 36.15,75.58 37.55,75.58
no net on Top Paste "NONET_L01_P-001" (solid): 37.55,76.29 36.15,76.29 36.15,76.08 37.55,76.08
no net on Top Paste "NONET_L01_P-001" (solid): 37.55,76.79 36.15,76.79 36.15,76.58 37.55,76.58
no net on Top Paste "NONET_L01_P-001" (solid): 37.55,77.29 36.15,77.29 36.15,77.08 37.55,77.08
no net on Top Paste "NONET_L01_P-001" (solid): 37.55,77.79 36.15,77.79 36.15,77.58 37.55,77.58
no net on Top Paste "NONET_L01_P-001" (solid): 37.55,78.29 36.15,78.29 36.15,78.08 37.55,78.08
no net on Top Paste "NONET_L01_P-001" (solid): 37.55,78.79 36.15,78.79 36.15,78.58 37.55,78.58
no net on Top Paste "NONET_L01_P-001" (solid): 37.55,79.29 36.15,79.29 36.15,79.08 37.55,79.08
no net on Top Paste "NONET_L01_P-001" (solid): 37.55,79.79 36.15,79.79 36.15,79.58 37.55,79.58

## Silkscreen, mask and mechanical layers (free items; w line width, h text height)
Top Overlay:
  lines w0.2: 5.09,80.63 30.89,80.63 ; 18.13,64.2 18.2,82.09
  text "Bottom" at 5.39,81.14 h1
  text "Top" at 18.54,80.89 h1
  text "adhes." at 38.84,75.59 h0.7 r90
  text "Vbias / PD_Gate_row4 / PD_Gate_row3 / PD_Gate_row2 / PD_Gate_row1 / PD_col4 / PD_col3 / PD_col2 / PD_col1" at 5.14,64.19 h1
  text "Vbias / LED_OUT_col4 / LED_OUT_col3 / LED_OUT_col2 / LED_OUT_col1 / LED_IN_row4 / LED_IN_row3 / LED_IN_row2 / LED_IN_row1" at 18.74,64.04 h1
  text "S33" at -1.33,45.21 h1
  text "S23" at -9.78,40.88 h1
  text "S34" at 7.42,40.84 h1
  text "S24" at -1.3,37.52 h1
  text "S21" at -14.35,31.57 h1
  text "S31" at 11.98,31.57 h1
  text "S22" at -7.63,31.45 h1
  text "S32" at 5.12,31.44 h1
  text "S13" at 4.46,23.18 h1
  text "S43" at 4.34,14.65 h1
  text "S12" at -8.2,12.23 h1
  text "S42" at 5.94,12.2 h1
  text "S41" at 14.14,11.81 h1
  text "S11" at -16.03,11.77 h1
  text "S14" at -1.41,-1.09 h1
oslo_contour:
  lines w0.15: -5.624,-1.692 5.876,-1.692
  lines w0.2: -12.95,10.197 -9.1,10.197 ; -12.75,7.197 -9.15,7.197 ; -10.9,27.98 -8.15,27.98 ; -10.9,30.98 -8.15,30.98 ; -7.264,35.528 -2.758,31.022 ; -6.264,36.428 -1.5,31.73 ; -4.85,7.197 4.85,7.197 ; -4.85,10.197 4.95,10.197 ; -4,30.98 3.85,30.98 ; -3.95,27.98 3.9,27.98 ; -3.049,-6.742 cw(c-3.049,-4.742) -5.049,-4.742 -5.049,3.458 ccw(c-7.049,3.458) -7.049,5.458 -16.049,5.458 cw(c-16.049,7.458) -18.049,7.458 -18.049,9.858 cw(c-16.049,9.858) -16.049,11.858 -7.249,11.858 ccw(c-7.249,13.858) -5.249,13.858 -5.249,24.258 ccw(c-7.249,24.258) -7.249,26.258 -13.049,26.258 cw(c-13.049,28.258) -15.049,28.258 -15.049,30.658 cw(c-13.049,30.658) -13.049,32.658 -7.049,32.658 ccw(c-7.049,34.658) -5.049,34.658 -5.049,47.858 cw(c-2.349,47.858) -3.699,50.196 -2.499,50.945 ccw(c-3.849,53.283) -1.149,53.283 ; -1.5,-6.27 -1.5,2.23 ; -1.5,6.28 -1.5,12.53 ; -1.5,16.68 -1.5,21.58 ; -1.5,25.68 -1.5,32.98 ; -1.5,37.13 -1.5,38.33 ; -1.5,40.63 -1.5,38.33 ; 1.051,53.283 ccw(c3.751,53.283) 2.401,50.945 3.601,50.196 cw(c2.251,47.858) 4.951,47.858 4.951,34.658 ccw(c6.951,34.658) 6.951,32.658 12.951,32.658 cw(c12.951,30.658) 14.951,30.658 14.951,28.258 cw(c12.951,28.258) 12.951,26.258 7.151,26.258 ccw(c7.151,24.258) 5.151,24.258 5.151,13.858 ccw(c7.151,13.858) 7.151,11.858 15.951,11.858 cw(c15.951,9.858) 17.951,9.858 17.951,7.458 cw(c15.951,7.458) 15.951,5.458 6.951,5.458 ccw(c6.951,3.458) 4.951,3.458 4.951,-4.742 cw(c2.951,-4.742) 2.951,-6.742 ; 1.45,38.33 -1.5,38.33 ; 1.5,-6.22 1.5,2.13 ; 1.5,6.33 1.5,12.58 ; 1.5,16.68 1.5,21.58 ; 1.5,25.73 1.5,32.98 ; 1.5,37.13 1.5,38.33 1.5,40.58 ; 1.55,31.78 6.1,36.33 ; 2.8,31.03 7.2,35.43 ; 8.1,27.98 10.85,27.98 ; 8.1,30.98 10.85,30.98 ; 9.1,10.197 12.9,10.197 ; 9.15,7.197 12.8,7.197
Assembly Notes:
  circle w0.2: c0,4.33 r18
  circle w0.2: c0,4.33 r20
  lines w0.2: -2.367,13.08 -2.367,16.14 3.173,21.68 6.113,21.68 8.899,21.68 10.333,21.68 11.943,20.07 16.596,15.417 18.923,13.09 18.923,8.047 15.156,4.28 5.273,4.28 4.633,4.28 -2.367,11.28 -2.367,13.28 ; 0,-7.92 0,53.28 ; -18.227,6.547 -18.227,13.947 -13.677,18.497 -6.194,25.98 1.233,25.98 2.733,24.48 2.733,22.88 2.483,22.63 -3.167,16.98 -3.167,11.48 2.633,5.68 2.633,2.38 1.133,0.88 -7.21,0.88 -12.56,0.88 -18.227,6.547 ; -15.977,27.447 -15.977,36.397 -11.277,41.097 -2.477,41.097 2.623,35.997 2.623,32.597 -3.677,26.297 -14.827,26.297 -15.977,27.447 ; -2.927,42.197 -2.927,43.247 -2.927,44.597 -2.027,45.497 4.823,45.497 16.223,34.097 16.223,27.647 15.223,26.647 3.173,26.647 2.323,27.497 2.323,30.797 3.623,32.097 3.623,35.647 -2.927,42.197
  text "II" at -15.327,35.347 h1
  text "Teardrops  / T juncs.  / Anchor  / Blind traces w/ nec.  / correct contour  / Cable radius" at 17.375,21.635 h0.7
  text "I" at -14.427,13.247 h1
  text "IV" at 16.223,12.48 h1
board_shape:
  lines w0.2: -18.43,-11.46 -18.43,83.47 ; -18.43,83.54 46.57,83.54 46.57,-11.46 -18.41,-11.46
rect_board_shape_stiff_pcb:
  lines w0.3: -18,45 -17,45 ; -18.822,14.9 ccw(c0,4.33) 14.603,-11.568 16,-11 46,-11 46,83 -18,83 -18,16 -18.822,14.9
Stiffener:
  lines w0.1: 1.98,27.76 ccw(c1.98,27.77) 1.99,27.77 ; 1.98,27.76 ccw(c1.98,27.77) 1.99,27.77 ; 1.98,27.76 1.77,27.76 ccw(c1.77,27.41) 1.42,27.41 1.42,27.3 -1.42,27.3 -1.42,27.417 ccw(c-1.725,27.417) -1.725,27.722 -1.838,27.722 cw(c-1.838,27.724) -1.84,27.724 -1.84,29.32 -1.817,29.343 ccw(c-2.244,29.77) -1.64,29.77 -1.64,29.797 ccw(c-2.323,29.797) -1.84,30.28 -0.89,31.23 0.87,31.23 1.99,30.11 ccw(c2.304,29.796) 1.86,29.796 1.86,29.77 ccw(c2.27,29.77) 1.98,29.48 cw(c1.98,29.47) 1.99,29.47 1.99,27.77
opg_contour:
  drawing of 256 lines, arcs and shapes, not listed